# Altium PCB altium.PcbDoc (part 1 of 2)
Units mil, origin at the board's own origin, x right, y up, seen from the top; angles counter-clockwise.
Board outline 5119.1 x 2638.79 mil, 6 copper layers (TOP, L2_GND, L3_SIG, L4_VCC, L5_GND, BOTTOM), stack 61 mil thick; 336 components, 316 nets, 1351 pads, 0 vias.
Unrouted connection lines stored in the file: 850.
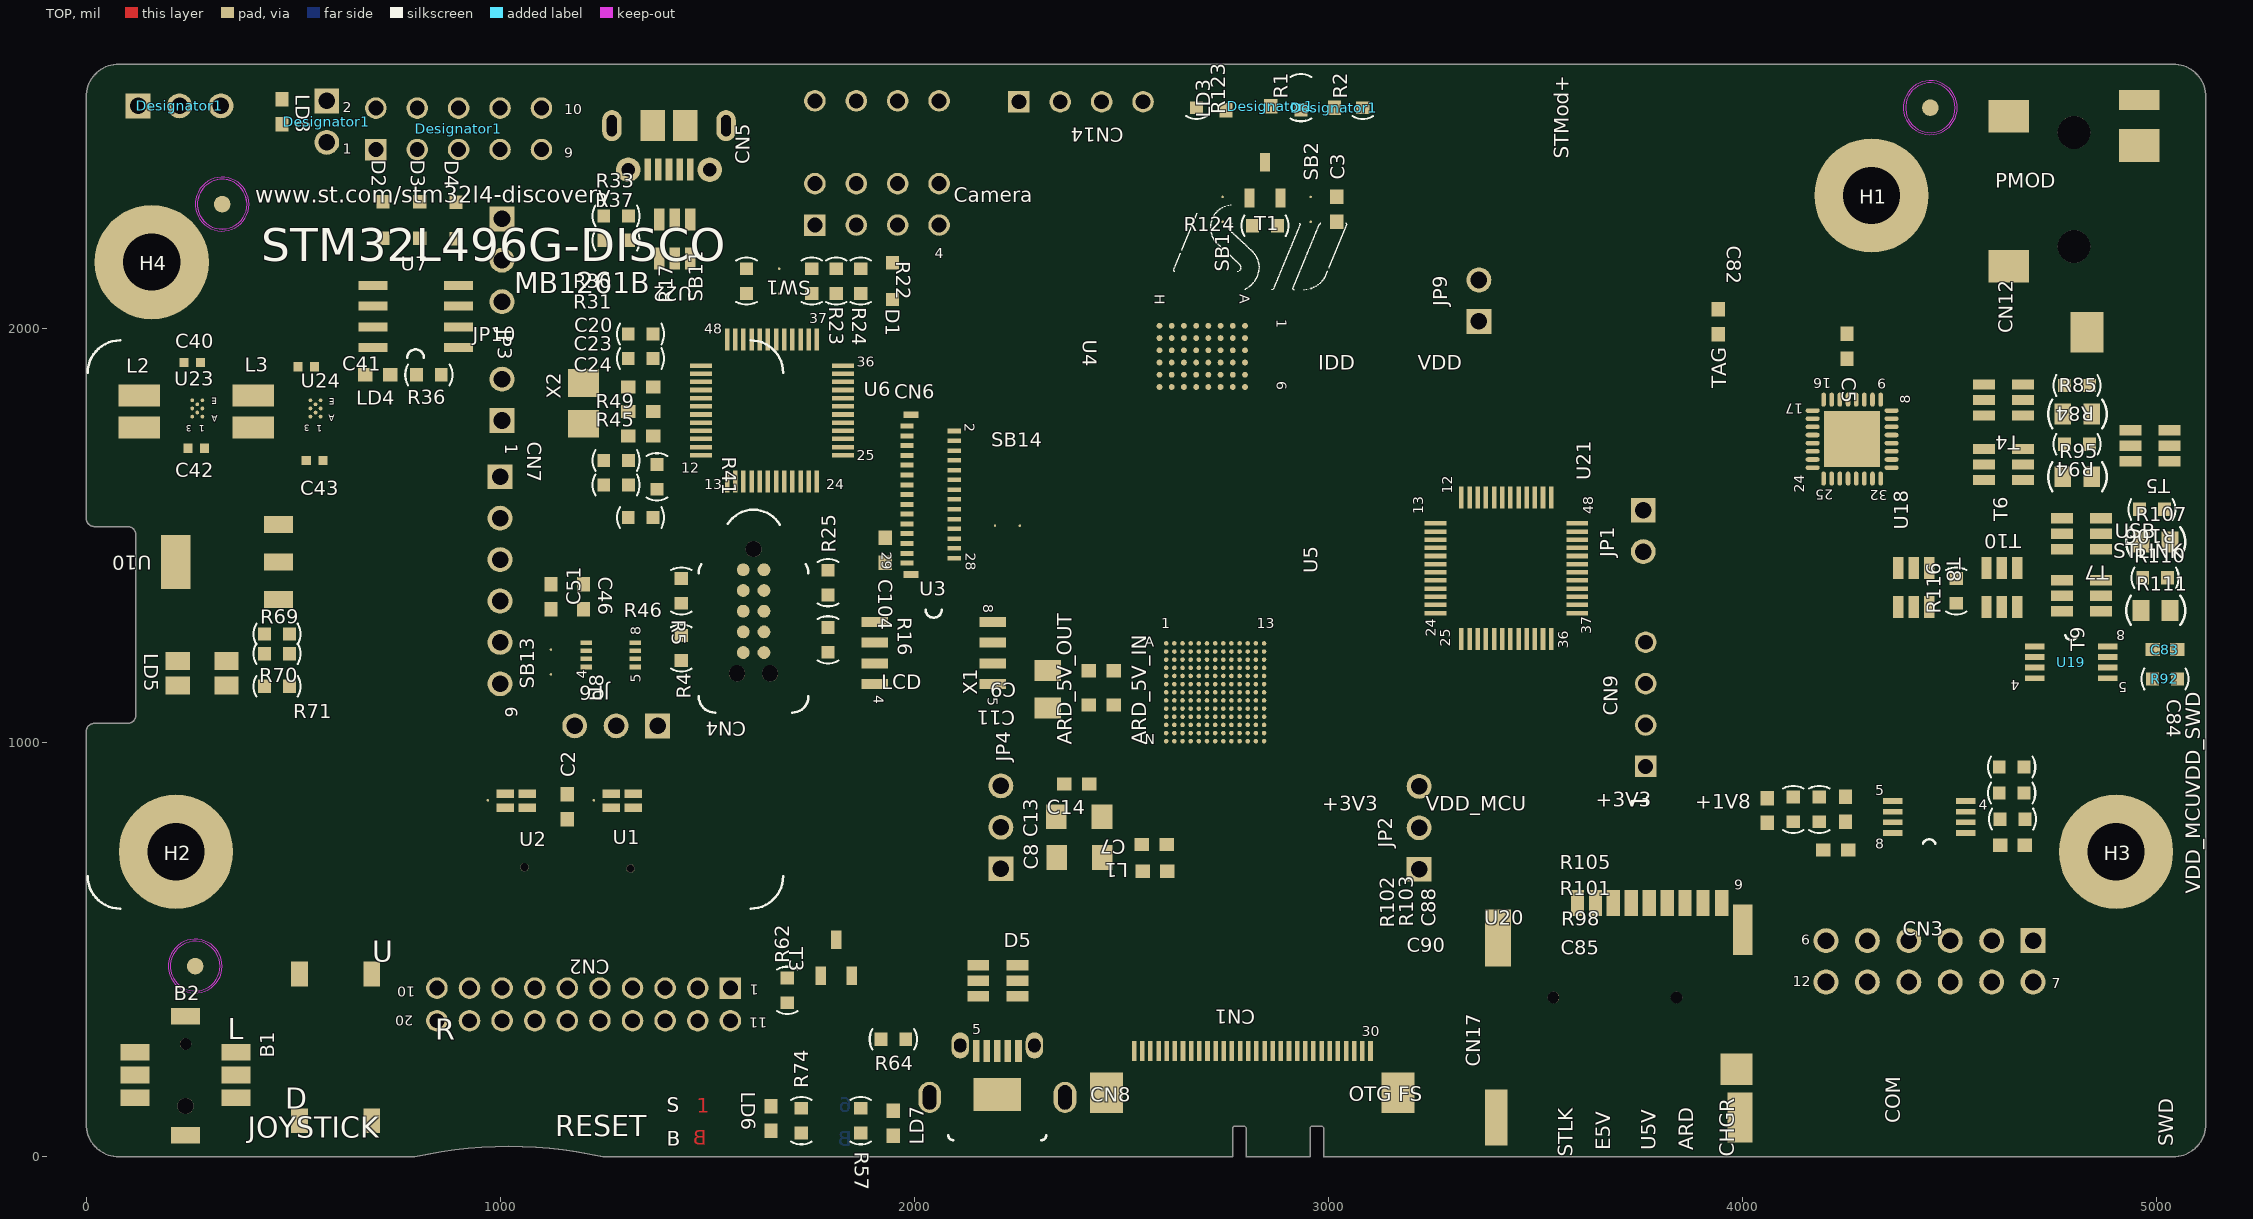
[diagram p0: TOP view]
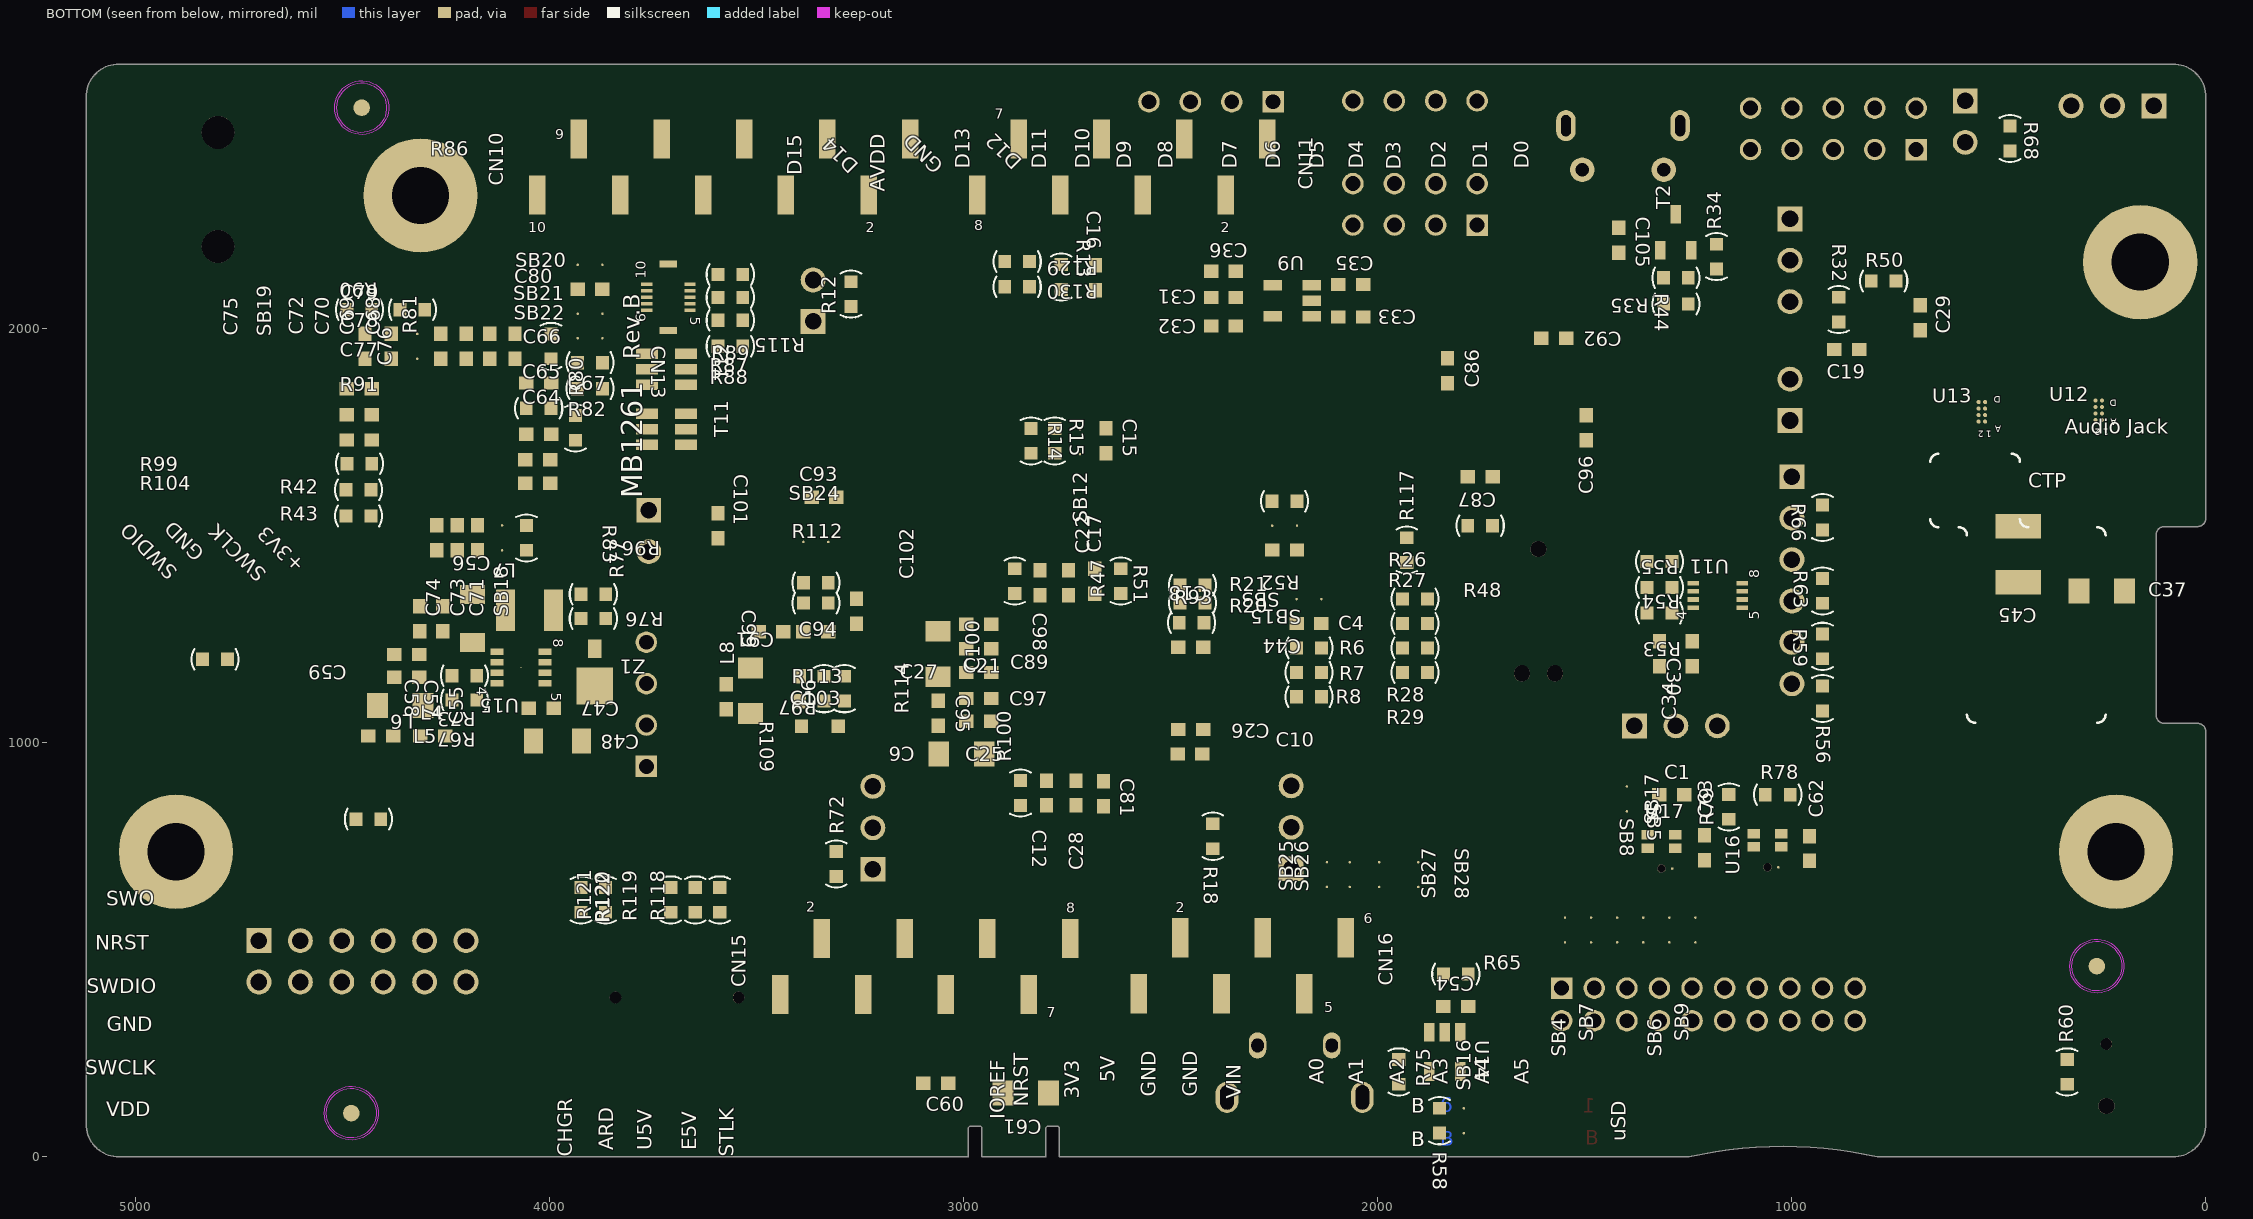
[diagram p1: BOTTOM view, seen from below]

## Layer stack, top to bottom
Top Solder: solder mask 0.6, Solder Resist, Dk 3.5
TOP: signal copper 0.8
Dielectric 1: core 2.8, FR-4, Dk 4.3
L2_GND: signal copper 0.8
Dielectric2: core 4, FR-4, Dk 4.3
L3_SIG: signal copper 0.6
Dielectric3: core 43, FR-4, Dk 4.3
L4_VCC: signal copper 0.6
Dielectric4: core 4, FR-4, Dk 4.3
L5_GND: signal copper 0.8
Dielectric5: core 2.8, FR-4, Dk 4.3
BOTTOM: signal copper 0.8
Bottom Solder: solder mask 0.6, Solder Resist, Dk 3.5

## Board outline
-0.5,78.74 ccw(c78.74,78.74) 78.74,-0.5 793.1,-0.5 793.27,-0.47 cw(c1020.6,-1007.5) 1247.93,-0.47 1248.1,-0.5 2767.86,-0.5 2768.36,0 2768.36,70.07 2772.01,73.72 2797.18,73.72 2800.83,70.07 2800.83,0 2801.33,-0.5 2954.87,-0.5 2955.37,0 2955.37,70.07 2959.02,73.72 2984.19,73.72 2987.84,70.07 2987.84,0 2988.34,-0.5 5039.36,-0.5 ccw(c5039.36,78.74) 5118.6,78.74 5118.6,2559.05 ccw(c5039.36,2559.05) 5039.36,2638.29 78.74,2638.29 ccw(c78.74,2559.05) -0.5,2559.05 -0.5,1541.93 ccw(c20,1541.93) 20,1521.43 100,1521.43 cw(c100,1501.93) 119.5,1501.93 119.5,1065.71 cw(c100,1065.71) 100,1046.21 20,1046.21 ccw(c20,1025.71) -0.5,1025.71

## Design rules (kind name [scope] priority, off if disabled: settings)
Clearance Clearance_Chevron [HasFootprint('SB_0603')] p1: gap=6 ignorepadtopadclearanceinfootprint=TRUE except(0: Arc-Text Arc-Hole Track-Text Track-Hole SMDPad-Text SMDPad-Hole THPad-Text THPad-Hole Via-Text Via-Hole Fill-Text Fill-Hole Poly-Text Poly-Hole Region-Text Region-Hole Text-Text Text-Hole; 3: Fill-Fill Fill-Poly Fill-Region Poly-Poly Poly-Region Region-Region; 5: Arc-SMDPad Arc-THPad Arc-Via Track-SMDPad Track-THPad Track-Via SMDPad-SMDPad SMDPad-THPad SMDPad-Via THPad-THPad THPad-Via Via-Via; 10: Arc-Arc Arc-Track Track-Track)
Clearance Clearance_3mm_BBvia [WithinRoom('RoomDefinition_3MM')      or (ObjectKind = 'Via') And (AsMils(HoleDiameter) = 4) vs (ObjectKind = 'Via') And (AsMils(HoleDiameter) = 4)] p2: gap=0 ignorepadtopadclearanceinfootprint=FALSE except(3: Arc-Via Track-Via; 4: SMDPad-Via THPad-Via Via-Via; 5: Via-Fill Via-Poly Via-Region)
Clearance Clearance_3mm_BBvia_via [WithinRoom('RoomDefinition_3MM')      or isvia vs (ObjectKind = 'Via') And (AsMils(HoleDiameter) = 4)] p3: gap=0 ignorepadtopadclearanceinfootprint=FALSE except(3: Arc-Via Track-Via; 4: SMDPad-Via THPad-Via Via-Via; 5: Via-Fill Via-Poly Via-Region)
Clearance Clearance_3mm [TouchesRoom('RoomDefinition_3MM')] p4: gap=5 ignorepadtopadclearanceinfootprint=FALSE except(0: Arc-Text Track-Text SMDPad-Text THPad-Text Via-Text Fill-Text Poly-Text Region-Text Text-Text Text-Hole; 3: Arc-SMDPad Arc-THPad Arc-Via Track-SMDPad Track-THPad Track-Via SMDPad-Via THPad-Via Via-Via; 4: Arc-Arc Arc-Track Arc-Hole Track-Track Track-Hole Via-Hole; 15: Fill-Fill Fill-Poly Fill-Region Poly-Poly Poly-Region Region-Region)
Clearance Clearance_BGA [TouchesRoom('RoomDefinition_BGA1')  or TouchesRoom('RoomDefinition_BGA2')        or TouchesRoom('RoomDefinition_BGA3')    or TouchesRoom('RoomDefinition_BGA4')    or WithinRoom('RoomDefinition_BGA5')    or WithinRoom('RoomDefinition_BGA6')] p5: gap=5 ignorepadtopadclearanceinfootprint=FALSE except(0: Arc-Text Arc-Hole Track-Text Track-Hole SMDPad-Text SMDPad-Hole THPad-Text THPad-Hole Via-Text Via-Hole Fill-Text Fill-Hole Poly-Text Poly-Hole Region-Text Region-Hole Text-Text Text-Hole; 4: Arc-Arc Arc-Track Arc-SMDPad Arc-THPad Arc-Via Track-Track Track-SMDPad Track-THPad Track-Via SMDPad-Via THPad-Via; 15: Fill-Fill Fill-Poly Fill-Region Poly-Poly Poly-Region Region-Region)
Clearance Clearance_Default_L3_L4 [OnLayer('L3_SIG') or              OnLayer('L4_VCC')] p6: gap=6 ignorepadtopadclearanceinfootprint=FALSE except(0: Arc-Text Arc-Hole Track-Text Track-Hole SMDPad-Text SMDPad-Hole THPad-Text THPad-Hole Via-Text Via-Hole Fill-Text Fill-Hole Poly-Text Poly-Hole Region-Text Region-Hole Text-Text Text-Hole; 5: Arc-SMDPad Arc-THPad Arc-Via Track-SMDPad Track-THPad Track-Via SMDPad-SMDPad SMDPad-THPad SMDPad-Via THPad-THPad THPad-Via Via-Via; 8: Arc-Arc Arc-Track Track-Track; 20: Fill-Fill Fill-Poly Fill-Region Poly-Poly Poly-Region Region-Region)
Clearance Clearance_Default [All] p7: gap=6 ignorepadtopadclearanceinfootprint=FALSE except(0: Arc-Text Track-Text SMDPad-Text THPad-Text Via-Text Fill-Text Poly-Text Region-Text Text-Text Text-Hole; 5: Arc-SMDPad Arc-THPad Arc-Via Arc-Hole Track-SMDPad Track-THPad Track-Via Track-Hole SMDPad-SMDPad SMDPad-THPad SMDPad-Via SMDPad-Hole THPad-THPad THPad-Via THPad-Hole Via-Via Via-Hole; 10: Arc-Arc Arc-Track Track-Track; 20: Fill-Fill Fill-Poly Fill-Region Poly-Poly Poly-Region Region-Region)
ComponentClearance [All] p1: gap=0 collisioncheckmode=3 verticalgap=0 showdistances=FALSE
DiffPairsRouting [InDifferentialPairClass('90Ohms')] p1: maxlimit=10.2 minlimit=9.5 mostfreqgap=10.2 toplayer_mingap=10.2 toplayer_minwidth=4.8 toplayer_maxwidth=4.8 toplayer_prefwidth=4.8 midlayer1_mingap=10.2 midlayer1_minwidth=4.8 midlayer1_maxwidth=4.8 midlayer1_prefwidth=4.8 midlayer2_maxgap=9.5 midlayer2_prefgap=9.5 midlayer2_minwidth=5.5 midlayer2_maxwidth=5.5 midlayer2_prefwidth=5.5 midlayer3_maxgap=9.5 midlayer3_prefgap=9.5 midlayer3_minwidth=5.5 midlayer3_maxwidth=5.5 midlayer3_prefwidth=5.5 midlayer4_mingap=10.2 midlayer4_minwidth=4.8 midlayer4_maxwidth=4.8 midlayer4_prefwidth=4.8 bottomlayer_mingap=10.2 bottomlayer_minwidth=4.8 bottomlayer_maxwidth=4.8 bottomlayer_prefwidth=4.8 maxuncoupledlength=500
HoleSize [All] p1: absolutevalues=TRUE maxlimit=140 minlimit=1 maxpercent=80.000 minpercent=20.000
HoleToHoleClearance [All] p1: gap=5 allowstackedmicrovias=TRUE
PlaneConnect PlaneConnect_BGA8 [(ObjectKind = 'Component') And (Footprint = 'BGA8_0R312-0R25_1R11X1R41')] p1: planeconnectstyle=Direct reliefexpansion=20 reliefentries=4 reliefconductorwidth=10 reliefairgap=10
PlaneConnect [All] p2: planeconnectstyle=Relief reliefexpansion=20 reliefentries=4 reliefconductorwidth=10 reliefairgap=10
PolygonConnect PolygonConnect_Hole [(Component = 'H4') or (Component = 'H3') or (Component = 'H2')or (Component = 'H1')] p1: connectstyle=Direct reliefconductorwidth=10 reliefentries=4 polygonreliefangle="90 Angle" airgapwidth=10
PolygonConnect PolygonConnect_USB [(ObjectKind = 'Pad') And (Layer = 'TOP') And (Name = 'CN5-10') or  (ObjectKind = 'Pad') And (Layer = 'TOP') And (Name = 'CN5-11') or (ObjectKind = 'Pad') And (Layer = 'TOP') And (Name = 'CN8-10')] p2: connectstyle=Direct reliefconductorwidth=10 reliefentries=4 polygonreliefangle="90 Angle" airgapwidth=10
PolygonConnect PolygonConnect_U17-U16 [(ObjectKind = 'Pad') And (Name = 'U17-3') or (ObjectKind = 'Pad') And (Name = 'U16-3')] p3: connectstyle=Direct reliefconductorwidth=10 reliefentries=4 polygonreliefangle="90 Angle" airgapwidth=10
PolygonConnect PolygonConnect_via [IsVia] p4: connectstyle=Direct reliefconductorwidth=10 reliefentries=4 polygonreliefangle="90 Angle" airgapwidth=10
PolygonConnect PolygonConnect_bga8 [(ObjectKind = 'Pad') And (Component = 'U23')or (Component = 'U24')or (Component = 'U12')or (Component = 'U13')] p5: connectstyle=Direct reliefconductorwidth=10 reliefentries=4 polygonreliefangle="90 Angle" airgapwidth=10
PolygonConnect [All] p6: connectstyle=Relief reliefconductorwidth=10 reliefentries=4 polygonreliefangle="90 Angle" airgapwidth=6
RoomDefinition Power [InComponentClass('Power')] p1: confinementstyle=ConfineIn formatcopy=TRUE lockcomponents=FALSE outline 4918.63,1185 4967.03,1185 4967.03,1241.2 4918.63,1241.2
RoomDefinition PSRAM [InComponentClass('PSRAM')] p2: confinementstyle=ConfineIn formatcopy=TRUE lockcomponents=FALSE outline 4384,1384 4444,1384 4444,1474 4384,1474
RoomDefinition QSPI [InComponentClass('QSPI')] p3: confinementstyle=ConfineIn formatcopy=TRUE lockcomponents=FALSE outline 3780,565 3780,610 3790,620 3805,620 3820,605 3878,605 3878,535.3 3809.7,535.3
RoutingVias [All] p1: holewidth=12 width=24 viastyle="Through Hole" minholewidth=4 minwidth=10 maxholewidth=12 maxwidth=24
ShortCircuit [(ObjectKind = 'Pad') And (Component = 'SW1')] p1: allowed=TRUE
SolderMaskExpansion [All] p1: expansion=3 istentingtop=FALSE
Width Width_20 [InNetClass('20MIL')] p1: maxlimit=100 minlimit=5 preferedwidth=20 minimp=50.000000 maximp=50.000000 favimp=50.000000
Width Width_3mm [TouchesRoom('RoomDefinition_3MM')] p2: maxlimit=100 minlimit=3.5 preferedwidth=3.5 minimp=50.000000 maximp=50.000000 favimp=50.000000
Width Width_BGA [WithinRoom('RoomDefinition_BGA1') or   WithinRoom('RoomDefinition_BGA2') or             WithinRoom('RoomDefinition_BGA3') or     WithinRoom('RoomDefinition_BGA4') or      WithinRoom('RoomDefinition_BGA5') or          WithinRoom('RoomDefinition_BGA6') or   WithinRoom('RoomDefinition_BGA7')] p3: maxlimit=12 minlimit=4 preferedwidth=4 midlayer1_maxwidth=10 midlayer2_maxwidth=10 midlayer3_maxwidth=10 midlayer4_maxwidth=10 bottomlayer_maxwidth=10 minimp=50.000000 maximp=50.000000 favimp=50.000000
Width [All] p4: maxlimit=100 minlimit=4 preferedwidth=4 toplayer_minwidth=5 toplayer_prefwidth=5 bottomlayer_minwidth=5 bottomlayer_prefwidth=5 minimp=60.000000 maximp=60.000000 favimp=60.000000
24 further rules are at their usual default settings.

## Classes and differential pairs
component class U_Top: H1 H2 H3 H4
component class TFT_LCD: C44 C47 C48 C55 C56 C57 C58 C59 C80 C82 C104 CN6 CN13 L4 L5 L6 L7 R52 R67 R73 R76 R77 R87 R88 R89 R99 R104 R115 R117 SB14 SB15 SB20 SB21 SB22 T11 T12 U15 Z1 ZZ1
component class STMOD+: CN2 CN3 SB4 SB5 SB6 SB7 SB8 SB9
component class ST_LINK: C19 C20 C23 C24 C29 C30 C31 C32 C33 C34 C35 C36 C46 C51 C86 C87 C92 C96 C105 CN4 CN5 CN7 CN14 D1 D2 D3 D4 JP6 JP10 LD4 LD5 R4 R5 R16 R17 R22 R23 R24 R25 R30 R31 R32 R33 R34 R35 R36 R37 R41 R44 R45 R46 R47 R48 R49 R50 R51 R53 R54 R55 R56 R59 R63 R66 R69 R70 R71 SB11 SB13 SW1 T2 U6 U7 U8 U9 U11 U22 X2
component class QSPI: C4 R6 R7 R8 R26 R27 R28 R29 SB3 U3
component class PSRAM: C15 C16 JP9 R12 R13 R14 R15 R129 R130 SB12 U4
component class Power: C37 C40 C41 C42 C43 C45 JP3 JP5 JP7 JP8 L2 L3 LD8 R68 U10 U12 U13 U23 U24
component class Peripherals: B1 B2 CN17 LD1 LD2 R1 R2 R60 R118 R119 R120 R121 R122
component class OTG: C54 CN8 D5 LD6 LD7 R57 R58 R62 R64 R65 R74 R75 SB16 T3 U14
component class MCU: C6 C7 C8 C9 C10 C11 C12 C13 C14 C17 C18 C21 C22 C25 C26 C27 C28 C81 C89 C95 C97 C98 C100 JP4 L1 R18 R20 R21 R42 R43 R93 U5 X1
component class IDD: C83 C84 C85 C88 C90 C91 C93 C94 C99 C101 C102 C103 CN9 D6 JP1 JP2 L8 R84 R85 R92 R94 R95 R96 R97 R98 R101 R102 R103 R105 R106 R107 R109 R110 R111 R112 R113 R114 R116 SB24 T4 T5 T6 T7 T8 T9 T10 U19 U20 U21
component class "Camera Interface": C60 C61 CN1 R100
component class Audio: C1 C2 C5 C62 C63 C64 C65 C66 C67 C68 C69 C70 C71 C72 C73 C74 C75 C76 C77 C78 C79 CN12 R78 R79 R80 R81 R82 R83 R86 R90 R91 SB17 SB18 SB19 U1 U2 U16 U17 U18
component class "Arduino_ Connectors": C3 CN10 CN11 CN15 CN16 LD3 R72 R123 R124 SB1 SB2 SB25 SB26 SB27 SB28 T1
net class PSRAM_A[0..18]: PSRAM_A0 PSRAM_A1 PSRAM_A2 PSRAM_A3 PSRAM_A4 PSRAM_A5 PSRAM_A6 PSRAM_A7 PSRAM_A8 PSRAM_A9 PSRAM_A10 PSRAM_A11 PSRAM_A12 PSRAM_A13 PSRAM_A14 PSRAM_A15 PSRAM_A16 PSRAM_A17 PSRAM_A18
net class D[0..15]: D0 D1 D2 D3 D4 D5 D6 D7 D8 D9 D10 D11 D12 D13 D14 D15
net class DCMI_D[0..7]: DCMI_D0 DCMI_D1 DCMI_D2 DCMI_D3 DCMI_D4 DCMI_D5 DCMI_D6 DCMI_D7
differential pair D_: +D_P -D_N

## Components (designator, comment, footprint, x,y, rotation, side; value= is the part's Value field where it differs from the comment)
B1 "TD-0341X-A00" PB10 602.36,263.78 r270 top
B2 "MT008-A" MT-008A 240.94,193.31 r270 top
C1 "CC0603KRX7R7BB104" 0603C 1289.37,873.62 r180 bottom value=100nF
C2 "CC0603KRX7R7BB104" 0603C 1161.42,844.49 r270 top value=100nF
C3 "[N/A]" 0603C 3019.68,2287.4 r90 top value=100nF
C4 "CC0603KRX7R7BB104" 0603C 2165.35,1287.4 r180 bottom value=100nF
C5 "CC0603KRX7R7BB104" 0603C 4251.97,1956.69 r90 top value=100nF
C6 "TAJA475K016R" TAN-A 3004.72,972.44 r180 bottom value=4.7uF
C7 "CC0603KRX7R7BB104" 0603C 2578.74,753.94 r0 top value=100nF
C8 "TAJA105K016R" TAN-A 2398.43,722.44 r0 top value=1uF
C9 "5.6pF" 0603C 2450.79,1173.23 r0 top
C10 "CC0603KRX7R7BB104" 0603C 2452.76,972.44 r180 bottom value=100nF
C11 "5.6pF" 0603C 2450.79,1090.55 r0 top
C12 "CC0603KRX7R7BB104" 0603C 2799.21,877.95 r270 bottom value=100nF
C13 "TAJA105K016R" TAN-A 2397.64,820.87 r0 top value=1uF
C14 "CC0603KRX7R7BB104" 0603C 2391.73,899.61 r180 top value=100nF
C15 "CC0603KRX7R7BB104" 0603C 2655.51,1728.35 r270 bottom value=100nF
C16 "CC0603KRX7R7BB104" 0603C 2681.1,2122.05 r90 bottom value=100nF
C17 "CC0603KRX7R7BB104" 0603C 2683.07,1389.76 r90 bottom value=100nF
C18 "CC0603KRX7R7BB104" 0603C 2450.79,1230.32 r180 bottom value=100nF
C19 "CC0603KRX5R7BB105" 0603C 866.54,1948.82 r0 bottom value=1uF
C20 "CC0603JRNPO9BN100" 0603C 1338.58,1858.27 r0 top value=10pF
C21 "CC0603KRX7R7BB104" 0603C 2962.6,1285.43 r0 bottom value=100nF
C22 "CC0603KRX7R7BB104" 0603C 2746.06,1385.83 r90 bottom value=100nF
C23 "CC0603JRNPO9BN100" 0603C 1338.58,1799.21 r0 top value=10pF
C24 "CC0603KRX7R7BB104" 0603C 1338.58,1740.16 r180 top value=100nF
C25 "CC0603KRX7R7BB104" 0603C 2962.6,1051.18 r0 bottom value=100nF
C26 "CC0603KRX7R7BB104" 0603C 2450.79,1031.5 r180 bottom value=100nF
C27 "CC0603KRX7R7BB104" 0603C 2962.6,1169.29 r0 bottom value=100nF
C28 "CC0603KRX7R7BB104" 0603C 2728.35,877.95 r270 bottom value=100nF
C29 "CC0603KRX7R7BB104" 0603C 689.37,2025.59 r270 bottom value=100nF
C30 "CC0603KRX7R7BB104" 0603C 1240.16,1214.17 r90 bottom value=100nF
C31 "CC0603KRX7R7BB104" 0603C 2372.05,2074.8 r0 bottom value=100nF
C32 "CC0603KRX5R7BB105" 0603C 2372.05,2005.91 r0 bottom value=1uF
C33 "CC0603KRX7R7BB104" 0603C 2064.96,2027.56 r180 bottom value=100nF
C34 "CC0603KRX7R7BB104" 0603C 1318.9,1214.17 r270 bottom value=100nF
C35 "CC0603KRX5R7BB105" 0603C 2064.96,2106.3 r180 bottom value=1uF
C36 "CC0603KRX7R9BB103" 0603C 2372.05,2137.8 r0 bottom value=10nF
C37 "TAJA106K016R" TAN-A 251.18,1366.14 r180 bottom value=10uF
C40 "GRM155R60J106ME11" 0402C 255.91,1917.32 r0 top value=10uF
C41 "GRM155R60J106ME11" 0402C 531.5,1907.48 r0 top value=10uF
C42 "GRM155R60J106ME11" 0402C 265.75,1710.63 r0 top value=10uF
C43 "GRM155R60J106ME11" 0402C 551.18,1681.1 r0 top value=10uF
C44 "CC0603KRX7R7BB104" 0603C 2224.41,1464.57 r0 bottom value=100nF
C45 "TAJB106K025RNJ" TAN-B 452.76,1454.72 r270 bottom value=10uF
C46 "CC0603KRX7R7BB104" 0603C 1200.79,1351.97 r270 top value=100nF
C47 "CC0603KRX7R9BB103" 0603C 4019.68,1082.68 r0 bottom value=10nF
C48 "CC1206KKX7R9BB475" 1206C 3980.32,1003.94 r0 bottom value=4.7uF
C51 "CC0603KRX7R7BB104" 0603C 1122.05,1351.97 r90 top value=100nF
C54 "CC0603KRX5R7BB475" 0603C 1811.02,362.2 r0 bottom value=4.7uF
C55 "TAJA106K016R" TAN-A 4359.84,1089.76 r0 bottom value=10uF
C56 "GRM31CR71A475KA01L" 1206C 4185.43,1299.21 r90 bottom value=4.7uF
C57 "CC0603KRX7R9BB103" 0603C 4257.48,1299.21 r90 bottom value=10nF
C58 "CC0603KRX7R7BB104" 0603C 4312.6,1299.21 r90 bottom value=100nF
C59 "CC0603KRX7R7BB104" 0603C 4344.09,1157.48 r180 bottom value=100nF
C60 "CC0603KRX7R7BB104" 0603C 3066.93,177.17 r180 bottom value=100nF
C61 "TAJA106K016R" TAN-A 2849.61,153.54 r0 bottom value=10uF
C62 "[N/A]" 0603C 956.69,744.09 r270 bottom value=100nF
C63 "[N/A]" 0603C 1210.63,745.67 r270 bottom value=100nF
C64 "CC0603JRNPO9BN151" 0603C 4027.56,1625.98 r180 bottom value=150pF
C65 "CC0603JRNPO9BN151" 0603C 4027.56,1683.07 r180 bottom value=150pF
C66 "CC0603KRX7R7BB104" 0603C 4025.59,1744.09 r0 bottom value=100nF
C67 "CC0603KRX5R7BB105" 0603C 4025.59,1868.11 r0 bottom value=1uF
C68 "C1608X5R1A106KT000E" 0603C 4082.68,1956.69 r270 bottom value=10uF
C69 "CC0603KRX5R7BB105" 0603C 4143.7,1956.69 r270 bottom value=1uF
C70 "CC0603KRX5R7BB105" 0603C 4200.79,1956.69 r270 bottom value=1uF
C71 "CC0603KRX7R7BB104" 0603C 4173.23,1494.09 r90 bottom value=100nF
C72 "CC0603KRX7R7BB104" 0603C 4262.2,1956.69 r90 bottom value=100nF
C73 "CC0603KRX7R7BB104" 0603C 4222.44,1494.09 r270 bottom value=100nF
C74 "CC0603KRX5R7BB105" 0603C 4271.65,1494.09 r270 bottom value=1uF
C75 "CC0603KRX7R8BB223" 0603C 4381.89,1956.69 r90 bottom value=22nF
C76 "CC0603KRX7R8BB223" 0603C 4444.88,1956.69 r90 bottom value=22nF
C77 "CC0603KRX5R7BB105" 0603C 4458.66,1730.32 r0 bottom value=1uF
C78 "CC0603KRX5R7BB105" 0603C 4458.66,1791.34 r180 bottom value=1uF
C79 "CC0603KRX5R7BB105" 0603C 4458.66,1854.33 r180 bottom value=1uF
C80 "CC0603KRX7R7BB104" 0603C 3901.57,2094.49 r0 bottom value=100nF
C81 "CC0603KRX7R7BB104" 0603C 2661.42,875.98 r270 bottom value=100nF
C82 "CC0603KRX7R7BB104" 0603C 3940.94,2015.75 r270 top value=100nF
C83 "CC0603KRX7R7BB104" 0603C 5019.68,1224.41 r180 top value=100nF
C84 "CC0603KRX5R7BB105" 0603C 4059.06,835.83 r270 top value=1uF
C85 "CC0603KRX7R7BB104" 0603C 4651.57,751.97 r180 top value=100nF
C86 "CC0603KRX7R7BB104" 0603C 1830.71,1897.64 r270 bottom value=100nF
C87 "CC0603KRX7R7BB104" 0603C 1751.97,1641.73 r180 bottom value=100nF
C88 "CC0603KRX7R7BB104" 0603C 4248.03,838.58 r270 top value=100nF
C89 "CC0603KRX7R7BB104" 0603C 2962.6,1226.38 r0 bottom value=100nF
C90 "CC0603KRX7R7BB104" 0603C 4224.41,740.16 r180 top value=100nF
C91 "TAJA105K016R" TAN-A 3513.78,1124.8 r90 bottom value=1uF
C92 "CC0603KRX7R7BB104" 0603C 1574.8,1976.38 r0 bottom value=100nF
C93 "CC0603KRX7R7BB104" 0603C 3336.61,1592.52 r0 bottom value=100nF
C94 "CC0603KRX7R7BB104" 0603C 3464.57,1267.72 r180 bottom value=100nF
C95 "CC0603KRX7R7BB104" 0603C 3061.02,1070.87 r90 bottom value=100nF
C96 "CC0603KRX7R7BB104" 0603C 1496.06,1759.84 r90 bottom value=100nF
C97 "CC0603KRX7R7BB104" 0603C 2962.6,1106.3 r0 bottom value=100nF
C98 "CC0603KRX7R7BB104" 0603C 2814.96,1385.83 r90 bottom value=100nF
C99 "[N/A]" 0603C 3395.67,1129.92 r90 bottom value=100nF
C100 "TAJA105K016R" TAN-A 3061.02,1213.78 r270 bottom value=1uF
C101 "CC0603KRX7R7BB104" 0603C 3592.52,1523.62 r270 bottom value=100nF
C102 "CC0603KRX7R7BB104" 0603C 3257.87,1316.93 r90 bottom value=100nF
C103 "CC0603KRX7R7BB104" 0603C 3356.3,1267.72 r0 bottom value=100nF
C104 "CC0603KRX7R7BB104" 0603C 1929.13,1464.57 r270 top value=100nF
C105 "CC0603KRX7R7BB104" 0603C 1417.32,2212.6 r90 bottom value=100nF
CN1 "FPU330ZH-BT1D3-CA" FPU330ZH-BT1D3-CA 2815.35,162.6 r0 top
CN2 "SQT-110-01-F-D-RA" SQT-110-01-F-D-RA 1196.06,231.89 r0 top
CN3 "SSW-106-02-F-D-RA" SSW-106-02-F-D-RA 4451.18,292.13 r0 top
CN4 "Tag-10_C" TC2050-IDC-NL 1611.42,1316.93 r270 top
CN5 "1050170001" MICRO_USB_B_105017 1407.09,2469.68 r180 top
CN6 "FH26-29S-0.3SHW" FH26-29S-0R3SHW 2041.34,1600 r270 top
CN7 "313106S111116" HDR_1X6_2R54_W 999.21,1391.73 r270 top
CN8 "475900001" MOLEX_47590001 2200,170.47 r0 top
CN9 "[N/A]" HDR_1X4_2R54 3765.75,1092.13 r270 top
CN10 "SSW-110-22-X-S-VS" SSW-110-22-X-S-VS 3578.74,2389.76 r180 bottom
CN11 "SSW-108-22-X-S-VS" SSW-108-22-X-S-VS 2616.54,2389.76 r180 bottom
CN12 "PJ3028B-3" PJ3028B 4800,2325 r90 top
CN13 "DF37NB-10DS-0.4V (5x)" DF37NB-10DS-0R4V 3712.6,2074.8 r270 bottom
CN14 "[N/A]" HDR_1X4_2R54 2401.97,2547.24 r180 top
CN15 "SSW-108-22-X-S-VS" SSW-108-22-X-S-VS 3092.13,459.06 r0 bottom
CN16 "SSW-106-22-X-S-VS" SSW-106-22-X-S-VS 2326.77,460.63 r0 bottom
CN17 "PJS008-2000" MSD_PJS008_ 3700.39,334.25 r180 top
D1 "BAT60JFILM" SOD-323 1948.03,2114.17 r90 top
D2 "[N/A]" SOD-323 717.72,2261.81 r90 top
D3 "BAT60JFILM" SOD-323 806.3,2261.81 r90 top
D4 "[N/A]" SOD-323 893.7,2260.63 r90 top
D5 "ESDA6V1BC6" SOT23-6L 2201.18,424.8 r270 top
D6 "BAT60JFILM" SOD-323 3346.46,1040.16 r0 bottom
Designator1 "2 PIN Jumper" SIP2 580.71,2499.21 r270 top (schematic designator JP8)
Designator1 "3 PIN Jumper" SIP3 225.2,2537.4 r0 top (schematic designator JP5)
Designator1 "Header M Straight 5x2H" HDR_2X5_2R54 899.61,2481.89 r0 top (schematic designator JP7)
Designator1 "19-217/S2C-AM2N2VY/3T" 0603D#1 2860.24,2566.93 r90 top (schematic designator LD1)
Designator1 "19-213SY6C/S530-E2/TR8LED" 0603D#1 3014.17,2562.99 r90 top (schematic designator LD2)
H1 "POSITION HOLE" HOLE_C7D3R5 4311.02,2320.87 r0 top
H2 "POSITION HOLE" HOLE_C7D3R5 216.54,736.22 r0 top
H3 "POSITION HOLE" HOLE_C7D3R5 4901.57,736.22 r0 top
H4 "POSITION HOLE" HOLE_C7D3R5 158,2160 r0 top
JP1 "[N/A]" SIP2 3759.84,1511.02 r270 top
JP2 "3 PIN Jumper" SIP3 3218.5,794.09 r90 top
JP3 "3 PIN Jumper" SIP3 1003.94,2164.57 r270 top
JP4 "Jumper3" SIP3 2208.66,795.28 r90 top
JP6 "3 PIN Jumper" SIP3 1279.53,1040.16 r180 top
JP9 "2 PIN Jumper" SIP2 3362.99,2066.93 r90 top
JP10 "[N/A]" SIP2 1003.94,1827.56 r90 top
L1 "FCM1608KF-601T03" 0603L 2580.71,688.98 r180 top value=100uH
L2 "2.2uH" L1008_L0805_CPT 127.95,1799.21 r90 top
L3 "2.2uH" L1008_L0805_CPT 403.54,1799.21 r90 top
L4 "FCM1608KF-601T03" 0603L 4281.1,1015.75 r0 bottom value=100uH
L5 "FCM1608KF-601T03" 0603L 4407.09,1015.75 r0 bottom value=100uH
L6 "FCM1608KF-601T03" 0603L 4344.09,1212.6 r180 bottom value=100uH
L7 "LQH32PN4R7NN0L" 1210L 4047.64,1318.9 r180 bottom value=100uH
L8 "FCM1608KF-601T03" 0603L 3572.83,1110.24 r90 bottom value=100uH
LD3 "19-213SY6C/S530-E2/TR8LED" 0603D#2 2751.97,2557.09 r270 top
LD4 "19-217/R6C-AL1M2VY/3T" 0603D#3 703.54,1887.8 r180 top
LD5 "HSMF-A201-A00J1" LED2_3528 279.53,1167.32 r90 top
LD6 "19-213SY6C/S530-E2/TR8LED" 0603D#3 1653.54,92.13 r90 top
LD7 "19-217/R6C-AL1M2VY/3T" 0603D#3 1948.82,80.71 r270 top
LD8 "19-213SY6C/S530-E2/TR8LED" 0603D#3 472.44,2523.23 r90 top
R1 "RC0603FR-07680RL" 0603R#1 2933.07,2557.09 r90 top value=680
R2 "RC0603FR-07510RL" 0603R#1 3082.68,2562.99 r90 top value=510
R4 "RC0603JR-07100RL" 0603R#2 1437.01,1228.35 r270 top value=100
R5 "RC0603JR-07100RL" 0603R#2 1437.01,1366.14 r270 top value=100
R6 "RC0603JR-0722RL" 0603R#2 2165.35,1228.35 r0 bottom value=22
R7 "RC0603JR-0722RL" 0603R#2 2165.35,1169.29 r0 bottom value=22
R8 "RC0603JR-0722RL" 0603R#2 2165.35,1110.24 r0 bottom value=22
R12 "0" 0603R#2 3271.65,2082.68 r270 bottom
R13 "RC0603FR-07100KL" 0603R#2 2763.78,2124.02 r90 bottom value=100K
R14 "RC0603FR-07100KL" 0603R#2 2836.61,1728.35 r270 bottom value=100K
R15 "RC0603FR-07100KL" 0603R#2 2779.53,1728.35 r90 bottom value=100K
R16 "RC0603JR-07100RL" 0603R#2 1791.34,1248.03 r90 top value=100
R17 "RC0603FR-07100KL" 0603R#2 1594.49,2114.17 r90 top value=100K
R18 "[N/A]" 0603R#2 2397.64,773.62 r270 bottom value=0
R20 "RC0603FR-07100KL" 0603R#2 2446.85,1336.61 r0 bottom value=100K
R21 "[N/A]" 0603R#2 2446.85,1379.92 r0 bottom value=100K
R22 "RC0603FR-074K7L" 0603R#2 1751.97,2114.17 r90 top value=4K7
R23 "RC0603FR-072K7L" 0603R#2 1811.02,2114.17 r270 top value=2K7
R24 "[N/A]" 0603R#2 1870.08,2114.17 r90 top value=0Ohm
R25 "RC0603JR-07100RL" 0603R#2 1791.34,1385.83 r270 top value=100
R26 "RC0603JR-0722RL" 0603R#2 1909.45,1346.46 r180 bottom value=22
R27 "RC0603FR-0710KL" 0603R#2 1909.45,1287.4 r0 bottom value=10K
R28 "RC0603JR-0722RL" 0603R#2 1909.45,1228.35 r180 bottom value=22
R29 "RC0603JR-0722RL" 0603R#2 1909.45,1169.29 r180 bottom value=22
R30 "RC0603FR-0710KL" 0603R#2 1338.58,1986.22 r0 top value=10K
R31 "[N/A]" 0603R#2 1338.58,1927.17 r0 top value=100K
R32 "RC0603FR-0710KL" 0603R#2 886.22,2045.28 r90 bottom value=10K
R33 "RC0603FR-07100KL" 0603R#2 1279.53,2271.65 r0 top value=100K
R34 "RC0603FR-0736KL" 0603R#2 1181.1,2173.23 r90 bottom value=36K
R35 "RC0603JR-07100RL" 0603R#2 1279.53,2059.06 r0 bottom value=100
R36 "820" 0603R#2 827.17,1887.8 r0 top
R37 "RC0603FR-071K5L" 0603R#2 1279.53,2212.6 r0 top value=1K5
R41 "[N/A]" 0603R#2 1377.95,1641.73 r270 top value=100K
R42 "RC0603FR-071K5L" 0603R#2 4460.63,1610.24 r180 bottom value=1K5
R43 "RC0603FR-071K5L" 0603R#2 4460.63,1547.24 r180 bottom value=1K5
R44 "RC0603FR-0710KL" 0603R#2 1279.53,2122.05 r180 bottom value=10K
R45 "RC0603FR-074K7L" 0603R#2 1279.53,1622.05 r180 top value=4K7
R46 "RC0603JR-070RL" 0603R#2 1338.58,1543.31 r180 top value=0
R47 "RC0603JR-070RL" 0603R#2 2875.98,1389.76 r90 bottom value=0
R48 "RC0603FR-07100KL" 0603R#2 1751.97,1523.62 r180 bottom value=100K
R49 "RC0603FR-074K7L" 0603R#2 1279.53,1681.1 r180 top value=4K7
R50 "RC0603FR-072K2L" 0603R#2 777.56,2114.17 r180 bottom value=2K2
R51 "RC0603JR-070RL" 0603R#2 2620.08,1389.76 r90 bottom value=0
R52 "RC0603FR-07100KL" 0603R#2 2224.41,1582.68 r0 bottom value=100K
R53 "RC0603FR-07100KL" 0603R#2 1318.9,1312.6 r0 bottom value=100K
R54 "RC0603FR-07100KL" 0603R#2 1318.9,1437.01 r0 bottom value=100K
R55 "RC0603JR-070RL" 0603R#2 1318.9,1374.02 r180 bottom value=0
R56 "RC0603JR-07100RL" 0603R#2 925.2,1106.3 r270 bottom value=100
R57 "RC0603JR-070RL" 0603R#2 1870.08,86.61 r270 top value=0
R58 "RC0603JR-0747KL" 0603R#2 1850.39,86.61 r90 bottom value=47K
R59 "RC0603JR-07100RL" 0603R#2 925.2,1232.28 r270 bottom value=100
R60 "RC0603JR-07100RL" 0603R#2 334.65,204.72 r270 bottom value=100
R62 "RC0603JR-0747KL" 0603R#2 1692.91,401.57 r90 top value=47K
R63 "RC0603JR-07100RL" 0603R#2 925.2,1366.14 r270 bottom value=100
R64 "RC0603JR-0747KL" 0603R#2 1948.82,283.46 r180 top value=47K
R65 "RC0603JR-0710KL" 0603R#2 1811.02,440.94 r180 bottom value=10K
R66 "RC0603JR-07100RL" 0603R#2 925.2,1543.31 r270 bottom value=100
R67 "RC0603FR-0710RL" 0603R#2 4205.12,1102.36 r0 bottom value=10
R68 "820" 0603R#2 472.44,2458.66 r270 bottom
R69 "RC0603JR-07100RL" 0603R#2 460.63,1261.81 r180 top value=100
R70 "RC0603JR-070RL" 0603R#2 460.63,1214.57 r180 top value=0
R71 "RC0603JR-07100RL" 0603R#2 460.63,1135.83 r180 top value=100
R72 "1K" 0603R#2 3307.09,706.69 r270 bottom
R73 "RC0603FR-07100KL" 0603R#2 4205.12,1161.42 r0 bottom value=100K
R74 "RC0603JR-07330RL" 0603R#2 1726.77,86.61 r270 top value=330
R75 "RC0603JR-07620RL" 0603R#2 1948.82,204.72 r270 bottom value=620
R76 "RC0603FR-07100KL" 0603R#2 3893.7,1299.21 r180 bottom value=100K
R77 "[N/A]" 0603R#2 3893.7,1358.27 r180 bottom value=100K
R78 "RC0603FR-0710KL" 0603R#2 1033.46,874.02 r0 bottom value=10K
R79 "[N/A]" 0603R#2 1151.57,844.49 r90 bottom value=10K
R80 "RC0603JR-070RL" 0603R#2 3937.01,1759.84 r270 bottom value=0
R81 "RC0603FR-07100KL" 0603R#2 3996.06,1956.69 r90 bottom value=100K
R82 "RC0603FR-072K2L" 0603R#2 4025.59,1807.09 r0 bottom value=2K2
R83 "RC0603FR-0710KL" 0603R#2 4055.12,1494.09 r90 bottom value=10K
R84 "RC0603FR-07100KL" 0603R#2 4807.09,1862.2 r180 top value=100K
R85 "1_1%_0805" 0805R 4807.87,1793.31 r0 top value=1
R86 "RC0603FR-0750RL" 0603R#2 4330.71,2045.28 r180 bottom value=50
R87 "[N/A]" 0603R#2 3562.99,2074.8 r180 bottom value=1K5
R88 "[N/A]" 0603R#2 3562.99,2019.68 r0 bottom value=1K5
R89 "[N/A]" 0603R#2 3562.99,2129.92 r180 bottom value=100K
R90 "RC0603FR-0750RL" 0603R#2 4458.66,2045.28 r0 bottom value=50
R91 "RC0603FR-0710KL" 0603R#2 4458.66,1673.23 r180 bottom value=10K
R92 "RC0603FR-076K04L" 0603R#2 5019.68,1153.54 r180 top value=6K04
R93 "RC0603JR-070RL" 0603R#2 2448.82,1289.37 r0 bottom value=0
R94 "RC0603FR-07100KL" 0603R#2 4807.09,1720.47 r0 top value=100K
R95 "10K_1%_0805" 0805R 4807.87,1641.73 r0 top value=10K
R96 "RC0603FR-076K04L" 0603R#2 4807.09,1200.79 r180 bottom value=6K04
R97 "RC0603FR-07300KL" 0603R#2 4437.01,814.96 r0 bottom value=300K
R98 "RC0603FR-0711KL" 0603R#2 4651.57,814.96 r0 top value=11K
R99 "[N/A]" 0603R#2 3901.57,1917.32 r0 bottom value=100K
R100 "RC0603JR-0722RL" 0603R#2 2862.2,877.95 r90 bottom value=22
R101 "RC0603FR-07357KL" 0603R#2 4649.61,877.95 r180 top value=357K
R102 "RC0603JR-07100RL" 0603R#2 4122.05,838.58 r270 top value=100
R103 "RC0603FR-07300KL" 0603R#2 4185.04,838.58 r270 top value=300K
R104 "[N/A]" 0603R#2 3901.57,1854.33 r0 bottom value=100K
R105 "RC0603JR-070RL" 0603R#2 4649.61,940.94 r180 top value=0
R106 "RC0603FR-07100KL" 0603R#2 4988.19,1562.99 r180 top value=100K
R107 "24_1%_0805" 0805R 4996.85,1484.25 r0 top value=24
R109 "RC0603FR-07100KL" 0603R#2 3336.61,1129.92 r90 bottom value=100K
R110 "RC0603FR-07100KL" 0603R#2 4996.06,1397.64 r180 top value=100K
R111 "620_1%_0805" 0805R 4996.85,1318.9 r0 top value=620
R112 "RC0603FR-07510RL" 0603R#2 3356.3,1385.83 r0 bottom value=510
R113 "RC0603FR-0710KL" 0603R#2 3356.3,1336.61 r0 bottom value=10K
R114 "RC0603JR-070RL" 0603R#2 3287.4,1129.92 r90 bottom value=0
R115 "RC0603FR-07100KL" 0603R#2 3562.99,1956.69 r0 bottom value=100K
R116 "RC0603FR-07100KL" 0603R#2 4515.75,1366.14 r270 top value=100K
R117 "RC0603FR-07100KL" 0603R#2 1929.13,1464.57 r90 bottom value=100K
R118 "47K" 0603R#2 3588.58,620.08 r90 bottom
R119 "47K" 0603R#2 3647.64,620.08 r90 bottom
R120 "47K" 0603R#2 3706.69,620.08 r90 bottom
R121 "47K" 0603R#2 3864.17,620.08 r90 bottom
R122 "47K" 0603R#2 3923.23,620.08 r90 bottom
R123 "RC0603JR-07510RL" 0603R#1 2681.1,2562.99 r90 top value=510
R124 "1M" 0603R#2 2846.46,2248.03 r0 top
R129 "RC0603JR-070RL" 0603R#2 2870.08,2161.42 r0 bottom value=0
R130 "[N/A]" 0603R#2 2870.08,2100.39 r0 bottom value=0
SB1 "Solder Bridge ON" SB_0603 2744.09,2287.4 r90 top
SB2 "Solder Bridge OFF" SB_0603 2956.69,2287.4 r270 top
SB3 "Solder Bridge ON" SB_0603 2165.35,1346.46 r0 bottom
SB4 "Solder Bridge OFF" SB_0603 1547.24,547.24 r90 bottom
SB5 "Solder Bridge OFF" SB_0603 1358.27,547.24 r270 bottom
SB6 "Solder Bridge ON" SB_0603 1295.28,547.24 r90 bottom
SB7 "Solder Bridge ON" SB_0603 1484.25,547.24 r90 bottom
SB8 "Solder Bridge ON" SB_0603 1421.26,547.24 r270 bottom
SB9 "Solder Bridge OFF" SB_0603 1232.28,547.24 r90 bottom
SB11 "Solder Bridge OFF" SB_0603 1673.23,2114.17 r90 top
SB12 "Solder Bridge ON" SB_0603 2718.5,1726.38 r270 bottom
SB13 "Solder Bridge ON" SB_0603 1122.05,1194.49 r270 top
SB14 "Solder Bridge ON" SB_0603 2224.41,1523.62 r180 top
SB15 "Solder Bridge OFF" SB_0603 2224.41,1523.62 r180 bottom
SB16 "Solder Bridge ON" SB_0603 1791.34,86.61 r270 bottom
SB17 "Solder Bridge ON" SB_0603 1397.64,863.78 r90 bottom
SB18 "Solder Bridge ON" SB_0603 4114.17,1494.09 r90 bottom
SB19 "Solder Bridge ON" SB_0603 4318.9,1956.69 r270 bottom
SB20 "Solder Bridge ON" SB_0603 3901.57,2153.54 r180 bottom
SB21 "Solder Bridge ON" SB_0603 3901.57,2035.43 r0 bottom
SB22 "Solder Bridge OFF" SB_0603 3901.57,1976.38 r180 bottom
SB24 "Solder Bridge ON" SB_0603 3356.3,1484.25 r180 bottom
SB25 "Solder Bridge OFF" SB_0603 2122.05,681.1 r270 bottom
SB26 "Solder Bridge ON" SB_0603 2066.93,681.1 r270 bottom
SB27 "Solder Bridge OFF" SB_0603 1996.06,681.1 r270 bottom
SB28 "Solder Bridge ON" SB_0603 1901.57,681.1 r270 bottom
SW1 "EDG-501S" SW1_11R7X9R7-12R2X9R65-HDR_CPT 1909.45,2399.61 r0 top
T1 "BSN20BK" SOT-23 2846.46,2358.27 r0 top
T2 "9013-SOT23" SOT-23 1279.53,2232.28 r180 bottom
T3 "9013-SOT23" SOT-23 1811.02,480.32 r0 top
T4 "STT7P2UH7" SOT23-6L 4629.53,1827.17 r90 top
T5 "STT7P2UH7" SOT23-6L 4983.86,1716.93 r90 top
T6 "STT7P2UH7" SOT23-6L 4629.53,1671.26 r90 top
T7 "STT7P2UH7" SOT23-6L 4818.5,1504.33 r90 top
T8 "STT7P2UH7" SOT23-6L 4413.39,1374.02 r180 top
T9 "STT7P2UH7" SOT23-6L 4818.5,1354.72 r90 top
T10 "STT7P2UH7" SOT23-6L 4625.98,1374.02 r180 top
T11 "STT7P2UH7" SOT23-6L 3716.93,1756.3 r90 bottom
T12 "STT7P2UH7" SOT23-6L 3716.93,1901.18 r90 bottom
U1 "MP34DT01TR-M" MP34DT01TR 1294.49,859.06 r270 top
U2 "MP34DT01TR-M" MP34DT01TR 1038.58,859.06 r270 top
U3 "MX25R6435FM2IL0" SOIC8_1R27_5R28X7R9 2046.85,1216.54 r270 top
U4 "IS66WV51216EBLL-70BLI" FBGA48_0R75_6X8 2694.88,1932.28 r270 top
U5 "STM32L496AG" FBGA169_0R5_7X7 2725.98,1121.26 r0 top
U6 "STM32F103CBT6" LQFP48_0R5_9X9 1655.91,1801.97 r0 top
U7 "ST890CDR" SOIC8_1R27_4R9X6 795.28,2028.74 r90 top
U8 "SN74LVC2T45DCUT" USOP8_0R5_2X3R1 1266.14,1211.81 r270 top
U9 "LD3985M33R" SOT23-5 2205.91,2066.93 r90 bottom
U10 "LD1117S50TR" SOT-223 340.16,1435.83 r0 top
U11 "SN74LVC2T45DCUT" USOP8_0R5_2X3R1 1178.74,1355.12 r270 bottom
U12 "TPS62743" BGA8_0R4_0R9X1R6 258.27,1802.36 r180 bottom
U13 "TPS62743" BGA8_0R4_0R9X1R6 540.55,1798.43 r180 bottom
U14 "STMPS2141STR" SOT23-5 1837.8,252.76 r0 bottom
U15 "STLD40DPUR" SON8_0R65_3X3 4068.5,1181.1 r270 bottom
U16 "[N/A]" RHLGA5LD 1055.51,726.38 r90 bottom
U17 "[N/A]" RHLGA5LD 1311.81,723.62 r90 bottom
U18 "CS42L51-CNZ" QFN32_0R5_5X5 4264.17,1732.68 r0 top
U19 "TSZ122IST" MINISO8 4793.7,1193.7 r90 top
U20 "TSZ122IST" MINISO8 4450.39,820.08 r270 top
U21 "STM32L152CCT6" LQFP48_0R5_9X9 3429.13,1420.87 r90 top
U22 "USBLC6-2SC6" SOT23-6L 1420.87,2216.14 r180 top
U23 "ST1PS01EJR" BGA8_0R312-0R25_1R11X1R41 268.11,1806.69 r180 top
U24 "ST1PS01EJR" BGA8_0R312-0R25_1R11X1R41 553.54,1806.69 r180 top
X1 "NDK NX3215SA-32.768KHZ-EXS00A-MU00525" XTAL_2SM_3R2X1R5 2322.83,1128.35 r270 top
X2 "NX3225GD-8.00M" XTAL_2SM_3R2X2R5 1200.79,1818.9 r90 top
Z1 "STPS1L40M" DO-216AA 3890.16,1161.42 r90 bottom

## Footprints (in the part's own frame and the unit in brackets; to place one, negate y for a bottom-side part, rotate by r counter-clockwise, add the part's x,y. Pads: shape width x height; smd on the part's side, far side on the other; paste and mask are expansions set on the pad)
0402C [mil] "0402C"
  rect 22x22 smd: 1(-20,0) 2(20,0)
  body extent -35,-14 35,14, height 150
0603C [mil] "0603C"
  rect 35x32 smd: 1(-30,0) 2(30,0)
0603D#1 [mil] "0603D"
  rect 35x32 smd: 1(-30,0)
  body extent -50,-20 50,20, height 150
0603D#2 [mil] "0603D"
  rect 35x32 smd: 2(30,0)
  body extent -50,-20 50,20, height 150
0603D#3 [mil] "0603D"
  rect 35x32 smd: 1(-30,0) 2(30,0)
  body extent -50,-20 50,20, height 150
0603L [mil] "0603L"
  rect 35x32 smd: 1(-30,0) 2(30,0)
  body extent -50,-19 50,19, height 150
0603R#1 [mil] "0603R"
  rect 31x32 smd: 1(-30,0)
  silkscreen extent -57,-25 57,25, body extent -50,-20 50,20, height 150
0603R#2 [mil] "0603R"
  rect 31x32 smd: 1(-30,0) 2(30,0)
  silkscreen extent -57,-25 57,25, body extent -50,-20 50,20, height 150
0805R [mil] "0805R"
  rect 40x50 smd: 1(35,0) 2(-35,0)
  silkscreen extent -70,-35 71,35, body extent -65,-25 65,25, height 150
1206C [mil] "1206C"
  rect 46x60 smd: 1(-58,0) 2(58,0)
  body extent -81,-30 81,30, height 150
1210L [mil] "1210L"
  rect 46x100 smd: 1(-58,0) 2(58,0)
  body extent -83,-53 83,53, height 150
BGA8_0R4_0R9X1R6 [mil] "BGA8_0R4_0R9X1R6"
  round 10 smd: A1(7.87,-23.62) A2(-7.87,-23.62) B1(7.87,-7.87) B2(-7.87,-7.87) C1(7.87,7.87) C2(-7.87,7.87) D1(7.87,23.62) D2(-7.87,23.62)
  body extent -20,-35 20,35, height 150
BGA8_0R312-0R25_1R11X1R41 [mil] "BGA8_0R312-0R25_1R11X1R41"
  round 9 smd mask+1: A1(-12.28,19.69) A3(12.28,19.69) B2(0,9.84) C1(-12.28,0) C3(12.28,0) D2(0,-9.84) E1(-12.28,-19.69) E3(12.28,-19.69)
  body extent -22,-28 22,28, height 150
DF37NB-10DS-0R4V [mil] "DF37NB-10DS-0R4V"
  rect 8x27 smd: 1(-31.82,52.17) 2(-16.07,52.17) 3(-0.32,52.17) 4(15.43,52.17) 5(31.18,52.17) 6(31.18,-52.17) 7(15.43,-52.17) 8(-0.32,-52.17) 9(-16.07,-52.17) 10(-31.82,-52.17)
  rect 16x43 smd: 11(79.99,0) 12(-80.63,0)
  body extent -90,-70 90,70, height 150
DO-216AA [mil] "DO-216AA"
  rect 45x32 smd: 1(65,0)
  rect 90x89 smd: 2(-25,0)
  body extent -100,-55 100,55, height 150
FBGA48_0R75_6X8 [mil] "FBGA48_0R75_6X8"
  round 14 smd mask+2: A1(-73.82,103.35) A2(-44.29,103.35) A3(-14.76,103.35) A4(14.76,103.35) A5(44.29,103.35) A6(73.82,103.35) B1(-73.82,73.82) B2(-44.29,73.82) B3(-14.76,73.82) B4(14.76,73.82) B5(44.29,73.82) B6(73.82,73.82) C1(-73.82,44.29) C2(-44.29,44.29) C3(-14.76,44.29) C4(14.76,44.29) C5(44.29,44.29) C6(73.82,44.29) D1(-73.82,14.76) D2(-44.29,14.76) D3(-14.76,14.76) D4(14.76,14.76) D5(44.29,14.76) D6(73.82,14.76) E1(-73.82,-14.76) E2(-44.29,-14.76) E3(-14.76,-14.76) E4(14.76,-14.76) E5(44.29,-14.76) E6(73.82,-14.76) F1(-73.82,-44.29) F2(-44.29,-44.29) F3(-14.76,-44.29) F4(14.76,-44.29) F5(44.29,-44.29) F6(73.82,-44.29) G1(-73.82,-73.82) G2(-44.29,-73.82) G3(-14.76,-73.82) G4(14.76,-73.82) G5(44.29,-73.82) G6(73.82,-73.82) H1(-73.82,-103.35) H2(-44.29,-103.35) H3(-14.76,-103.35) H4(14.76,-103.35) H5(44.29,-103.35) H6(73.82,-103.35)
  body extent -120,-160 120,160, height 150
FBGA169_0R5_7X7 [mil] "FBGA169_0R5_7X7"
  round 11 smd mask+2: A1(-118.11,118.11) A2(-98.43,118.11) A3(-78.74,118.11) A4(-59.06,118.11) A5(-39.37,118.11) A6(-19.69,118.11) A7(0,118.11) A8(19.69,118.11) A9(39.37,118.11) A10(59.06,118.11) A11(78.74,118.11) A12(98.43,118.11) A13(118.11,118.11) B1(-118.11,98.43) B2(-98.43,98.43) B3(-78.74,98.43) B4(-59.06,98.43) B5(-39.37,98.43) B6(-19.69,98.43) B7(0,98.43) B8(19.69,98.43) B9(39.37,98.43) B10(59.06,98.43) B11(78.74,98.43) B12(98.43,98.43) B13(118.11,98.43) C1(-118.11,78.74) C2(-98.43,78.74) C3(-78.74,78.74) C4(-59.06,78.74) C5(-39.37,78.74) C6(-19.69,78.74) C7(0,78.74) C8(19.69,78.74) C9(39.37,78.74) C10(59.06,78.74) C11(78.74,78.74) C12(98.43,78.74) C13(118.11,78.74) D1(-118.11,59.06) D2(-98.43,59.06) D3(-78.74,59.06) D4(-59.06,59.06) D5(-39.37,59.06) D6(-19.69,59.06) D7(0,59.06) D8(19.69,59.06) D9(39.37,59.06) D10(59.06,59.06) D11(78.74,59.06) D12(98.43,59.06) D13(118.11,59.06) E1(-118.11,39.37) E2(-98.43,39.37) E3(-78.74,39.37) E4(-59.06,39.37) E5(-39.37,39.37) E6(-19.69,39.37) E7(0,39.37) E8(19.69,39.37) E9(39.37,39.37) E10(59.06,39.37) E11(78.74,39.37) E12(98.43,39.37) E13(118.11,39.37) F1(-118.11,19.69) F2(-98.43,19.69) F3(-78.74,19.69) F4(-59.06,19.69) F5(-39.37,19.69) F6(-19.69,19.69) F7(0,19.69) F8(19.69,19.69) F9(39.37,19.69) F10(59.06,19.69) F11(78.74,19.69) F12(98.43,19.69) F13(118.11,19.69) G1(-118.11,0) G2(-98.43,0) G3(-78.74,0) G4(-59.06,0) G5(-39.37,0) G6(-19.69,0) G7(0,0) G8(19.69,0) G9(39.37,0) G10(59.06,0) G11(78.74,0) G12(98.43,0) G13(118.11,0) H1(-118.11,-19.69) H2(-98.43,-19.69) H3(-78.74,-19.69) H4(-59.06,-19.69) H5(-39.37,-19.69) H6(-19.69,-19.69) H7(0,-19.69) H8(19.69,-19.69) H9(39.37,-19.69) H10(59.06,-19.69) H11(78.74,-19.69) H12(98.43,-19.69) H13(118.11,-19.69) J1(-118.11,-39.37) J2(-98.43,-39.37) J3(-78.74,-39.37) J4(-59.06,-39.37) J5(-39.37,-39.37) J6(-19.69,-39.37) J7(0,-39.37) J8(19.69,-39.37) J9(39.37,-39.37) J10(59.06,-39.37) J11(78.74,-39.37) J12(98.43,-39.37) J13(118.11,-39.37) K1(-118.11,-59.06) K2(-98.43,-59.06) K3(-78.74,-59.06) K4(-59.06,-59.06) K5(-39.37,-59.06) K6(-19.69,-59.06) K7(0,-59.06) K8(19.69,-59.06) K9(39.37,-59.06) K10(59.06,-59.06) K11(78.74,-59.06) K12(98.43,-59.06) K13(118.11,-59.06) L1(-118.11,-78.74) L2(-98.43,-78.74) L3(-78.74,-78.74) L4(-59.06,-78.74) L5(-39.37,-78.74) L6(-19.69,-78.74) L7(0,-78.74) L8(19.69,-78.74) L9(39.37,-78.74) L10(59.06,-78.74) L11(78.74,-78.74) L12(98.43,-78.74) L13(118.11,-78.74) M1(-118.11,-98.43) M2(-98.43,-98.43) M3(-78.74,-98.43) M4(-59.06,-98.43) M5(-39.37,-98.43) M6(-19.69,-98.43) M7(0,-98.43) M8(19.69,-98.43) M9(39.37,-98.43) M10(59.06,-98.43) M11(78.74,-98.43) M12(98.43,-98.43) M13(118.11,-98.43) N1(-118.11,-118.11) N2(-98.43,-118.11) N3(-78.74,-118.11) N4(-59.06,-118.11) N5(-39.37,-118.11) N6(-19.69,-118.11) N7(0,-118.11) N8(19.69,-118.11) N9(39.37,-118.11) N10(59.06,-118.11) N11(78.74,-118.11) N12(98.43,-118.11) N13(118.11,-118.11)
  body extent -138,-138 138,138, height 150
FH26-29S-0R3SHW [mil] "FH26-29S-0R3SHW"
  rect 12x32 smd: 1(-164.05,-59.59) 3(-140.43,-59.59) 5(-116.81,-59.59) 7(-93.19,-59.59) 9(-69.57,-59.59) 11(-45.94,-59.59) 13(-22.32,-59.59) 15(1.3,-59.59) 17(24.92,-59.59) 19(48.54,-59.59) 21(72.17,-59.59) 23(95.79,-59.59) 25(119.41,-59.59) 27(143.03,-59.59) 29(166.65,-59.59)
  rect 11x32 smd mask+2: 2(-152.24,54.59) 4(-128.62,54.59) 6(-105,54.59) 8(-81.38,54.59) 10(-57.76,54.59) 12(-34.13,54.59) 14(-10.51,54.59) 16(13.11,54.59) 18(36.73,54.59) 20(60.36,54.59) 22(83.98,54.59) 24(107.6,54.59) 26(131.22,54.59) 28(154.84,54.59)
  rect 16x37 smd: " "(-191.61,-49.74) " "(194.21,-49.74)
  body extent -204,-75 204,75, height 150
FPU330ZH-BT1D3-CA [mil] "FPU330ZH-BT1D3-CA"
  rect 11x49 smd mask+2: 1(-285,92.5) 2(-265.31,92.5) 3(-245.63,92.5) 4(-225.94,92.5) 5(-206.26,92.5) 6(-186.57,92.5) 7(-166.89,92.5) 8(-147.2,92.5) 9(-127.52,92.5) 10(-107.83,92.5) 11(-88.15,92.5) 12(-68.46,92.5) 13(-48.78,92.5) 14(-29.09,92.5) 15(-9.41,92.5) 16(10.28,92.5) 17(29.96,92.5) 18(49.65,92.5) 19(69.33,92.5) 20(89.02,92.5) 21(108.7,92.5) 22(128.39,92.5) 23(148.07,92.5) 24(167.76,92.5) 25(187.44,92.5) 26(207.13,92.5) 27(226.81,92.5) 28(246.5,92.5) 29(266.18,92.5) 30(285.87,92.5)
  rect 79x98 smd: 31(-351.54,-8.88) 32(352.4,-8.88)
  body extent -395,-122 395,123, height 150
HDR_1X4_2R54 [mil] "HDR_1X4_2R54"
  rect 52x52 hole 36: 1(150,0)
  round 52 hole 36: 2(50,0) 3(-50,0) 4(-150,0)
  body extent -200,-50 200,50, height 150
HDR_1X6_2R54_W [mil] "HDR_1X6_2R54_W"
  rect 60x60 / inner round 60 / far side rect 60x60 hole 40: 1(-250,0)
  round 60 hole 40: 2(-150,0) 3(-50,0) 4(50,0) 5(150,0) 6(250,0)
  body extent -300,-50 300,50, height 150
HDR_2X5_2R54 [mil] "HDR_2X5_2R54"
  rect 52x52 hole 36: 1(-200.39,-50)
  round 52 hole 36: 2(-200.39,50) 3(-100.39,-50) 4(-100.39,50) 5(-0.39,-50) 6(-0.39,50) 7(99.61,-50) 8(99.61,50) 9(199.61,-50) 10(199.61,50)
  body extent -245,-100 245,100, height 150
HOLE_C7D3R5 [mil] "HOLE_C7D3R5"
  round 276 hole 138: 1(0,0)
  body extent -144,-144 144,144, height 150
L1008_L0805_CPT [mil] "L1008_L0805_CPT"
  rect 53x100 smd: 1(-39,0) 2(39,0)
  body extent -70,-55 70,55, height 150
LED2_3528 [mil] "LED2_3528"
  rect 44x59 smd: 1(-29.53,-59.06) 2(-29.53,59.06) 3(29.53,59.06) 4(29.53,-59.06)
  body extent -55,-90 55,90, height 150
LQFP48_0R5_9X9 [mil] "LQFP48_0R5_9X9"
  rect 53x11 smd mask+2: 1(-171.26,108.27) 2(-171.26,88.58) 3(-171.26,68.9) 4(-171.26,49.21) 5(-171.26,29.53) 6(-171.26,9.84) 7(-171.26,-9.84) 8(-171.26,-29.53) 9(-171.26,-49.21) 10(-171.26,-68.9) 11(-171.26,-88.58) 12(-171.26,-108.27) 25(171.26,-108.27) 26(171.26,-88.58) 27(171.26,-68.9) 28(171.26,-49.21) 29(171.26,-29.53) 30(171.26,-9.84) 31(171.26,9.84) 32(171.26,29.53) 33(171.26,49.21) 34(171.26,68.9) 35(171.26,88.58) 36(171.26,108.27)
  rect 11x53 smd mask+2: 13(-108.27,-171.26) 14(-88.58,-171.26) 15(-68.9,-171.26) 16(-49.21,-171.26) 17(-29.53,-171.26) 18(-9.84,-171.26) 19(9.84,-171.26) 20(29.53,-171.26) 21(49.21,-171.26) 22(68.9,-171.26) 23(88.58,-171.26) 24(108.27,-171.26) 37(108.27,171.26) 38(88.58,171.26) 39(68.9,171.26) 40(49.21,171.26) 41(29.53,171.26) 42(9.84,171.26) 43(-9.84,171.26) 44(-29.53,171.26) 45(-49.21,171.26) 46(-68.9,171.26) 47(-88.58,171.26) 48(-108.27,171.26)
MICRO_USB_B_105017 [mil] "MICRO_USB_B_105017"
  rect 16x53 smd: 1(-51.18,85.45) 2(-25.59,85.45) 3(0,85.45) 4(25.59,85.45) 5(51.18,85.45)
  oval 47x75 hole 24 slot 51 at 90 deg: 6(-137.8,-19.86) 7(137.8,-19.86)
  round 59 hole 33: 8(-98.43,86.44) 9(98.43,86.44)
  rect 59x75 smd: 10(-39.37,-19.86) 11(39.37,-19.86)
  body extent -165,-118 165,118, height 150
MINISO8 [mil] "MINISO8"
  rect 14x47 smd: 1(38.39,87.99) 2(12.8,87.99) 3(-12.8,87.99) 4(-38.39,87.99) 5(-38.39,-87.99) 6(-12.8,-87.99) 7(12.8,-87.99) 8(38.39,-87.99)
  silkscreen extent 54,-15 65,15, body extent -59,-115 59,115, height 150
MOLEX_47590001 [mil] "MOLEX_47590001"
  rect 16x53 smd: 1(51.18,85.06) 2(25.59,85.06) 3(0,85.06) 4(-25.59,85.06) 5(-51.18,85.06)
  oval 42x63 hole 30 slot 33 at 90 deg: 6(89.57,97.86) 7(-89.57,97.86)
  oval 55x75 hole 33 slot 59 at 90 deg: 8(-163.39,-27.34) 9(163.39,-27.34)
  rect 114x79 smd: 10(0,-20.25)
  silkscreen extent -118,-131 118,-119, body extent -190,-130 190,130, height 150
MP34DT01TR [mil] "MP34DT01TR"
  rect 20x42 smd: 1(-16.97,26.73) 2(-16.97,-26.41) 3(16.49,-26.41) 4(16.49,26.73)
  round 6 smd: 5(-1.24,-68.84)
  body extent -59,-79 59,79, height 150
MSD_PJS008_ [mil] "MSD_PJS008_"
  rect 32x63 smd: 1(99.43,-278.35) 2(56.12,-278.35) 3(12.81,-278.35) 4(-30.49,-278.35) 5(-73.8,-278.35) 6(-117.11,-278.35) 7(-160.41,-278.35) 8(-203.72,-278.35)
  rect 33x63 smd: 9(-249,-278.35)
  rect 77x75 smd: 10(-284.43,123.23)
  rect 60x121 smd: 11(-293.29,239.37)
  rect 55x135 smd: 12(295.41,239.65)
  rect 63x138 smd: 13(291.36,-193.7)
  rect 47x122 smd: 14(-299.19,-213.39)
  round 28 hole 28 unplated: " "(-139.74,-50) " "(157.5,-50)
  body extent -328,-315 328,315, height 150
MT-008A [mil] "MT-008A"
  rect 39.99x70 smd: 1(-58.87,-123.3) 2(-3.75,-123.29) 3(51.37,-123.3) 4(51.37,120.81) 5(-3.75,120.8) 6(-58.87,120.81) 7(-145.48,-1.24) 8(141.92,-1.24)
  round 28 hole 28 unplated: " "(-78.55,-1.24)
  round 39 hole 39 unplated: " "(71.05,-1.24)
  body extent -169,-161 166,159, height 150
PB10 [mil] "PB10"
  rect 60x40 smd paste+12: 1(-177.16,-87.5) 2(-177.16,87.5) 3(177.18,87.5) 4(177.18,-87.5)
  body extent -207,-108 207,108, height 150
PJ3028B [mil] "PJ3028B"
  rect 79x98 smd: 3(187.62,157.48) 4(116.75,-157.48) 6(-174.58,157.48)
  rect 98x79 smd: 5(-334.03,-31.5)
  rect 48x98 smd: 7(226.99,-157.48)
  round 79 hole 79 unplated: " "(-127.34,0) " "(148.25,0)
  body extent -383,-210 383,210, height 150
QFN32_0R5_5X5 [mil] "QFN32_0R5_5X5"
  oval 34x11 smd mask+2: 1(95.28,-68.9) 2(95.28,-49.21) 3(95.28,-29.53) 4(95.28,-9.84) 5(95.28,9.84) 6(95.28,29.53) 7(95.28,49.21) 8(95.28,68.9) 17(-95.28,68.9) 18(-95.28,49.21) 19(-95.28,29.53) 20(-95.28,9.84) 21(-95.28,-9.84) 22(-95.28,-29.53) 23(-95.28,-49.21) 24(-95.28,-68.9)
  oval 11x34 smd mask+2: 9(68.9,95.28) 10(49.21,95.28) 11(29.53,95.28) 12(9.84,95.28) 13(-9.84,95.28) 14(-29.53,95.28) 15(-49.21,95.28) 16(-68.9,95.28) 25(-68.9,-95.28) 26(-49.21,-95.28) 27(-29.53,-95.28) 28(-9.84,-95.28) 29(9.84,-95.28) 30(29.53,-95.28) 31(49.21,-95.28) 32(68.9,-95.28)
  rect 135x135 smd: 33(0,0)
  body extent -115,-115 115,115, height 150
RHLGA5LD [mil] "RHLGA5LD"
  rect 23x30 smd: 1(53.7,35.47) 2(21.34,35.47) 4(21.34,-30.47) 5(53.7,-30.47)
  round 6 smd: 3(-28,-23.5)
  round 20 hole 20: " "(-27.95,2.5)
  body extent -70,-53 70,53, height 150
SB_0603 [mil] "SB_0603"
  round 6 smd: 1(-30,0) 2(30,0)
  body extent -50,-20 50,20, height 150
SIP2 [mil] "SIP2"
  rect 60x60 / inner round 60 / far side rect 60x60 hole 40: 1(-50,0)
  round 60 hole 40: 2(50,0)
SIP3 [mil] "SIP3"
  rect 60x60 / inner round 60 / far side rect 60x60 hole 40: 1(-100,0)
  round 60 hole 40: 2(0,0) 3(100,0)
SOD-323 [mil] "SOD-323"
  rect 32x32 smd: 1(44.29,1) 2(-44.29,1)
  body extent -65,-26 65,26, height 150
SOIC8_1R27_4R9X6 [mil] "SOIC8_1R27_4R9X6"
  rect 22x70 smd: 1(-75,-103.3) 2(-25,-103.3) 3(25,-103.3) 4(75,-103.3) 5(75,103.3) 6(25,103.3) 7(-25,103.3) 8(-75,103.3)
  silkscreen extent -100,-20 -79,20, body extent -96,-141 96,141, height 150
SOIC8_1R27_5R28X7R9 [mil] "SOIC8_1R27_5R28X7R9"
  rect 24x64 smd: 1(-74.5,-143.22) 2(-24.5,-143.22) 3(25.5,-143.22) 4(75.5,-143.22) 5(75.5,142.22) 6(25.5,142.22) 7(-24.5,142.22) 8(-74.5,142.22)
  silkscreen extent -104,-20 -85,19, body extent -105,-178 105,177, height 150
SON8_0R65_3X3 [mil] "SON8_0R65_3X3"
  rect 16x31 smd: 1(-38.39,-58.07) 2(-12.8,-58.07) 3(12.8,-58.07) 4(38.39,-58.07) 5(38.39,58.07) 6(12.8,58.07) 7(-12.8,58.07) 8(-38.39,58.07)
  oct 1x1 smd: 9(0,0)
  body extent -78,-78 78,78, height 150
SOT23-5 [mil] "SOT23-5"
  rect 25x45 smd: 1(-37.4,-47.24) 2(0,-47.24) 3(37.4,-47.24) 4(37.4,47.24) 5(-37.4,47.24)
  body extent -57,-70 57,70, height 150
SOT23-6L [mil] "SOT23-6L"
  rect 25x53 smd: 1(-37.4,-47.24) 2(0,-47.24) 3(37.4,-47.24) 4(37.4,47.24) 5(0,47.24) 6(-37.4,47.24)
  body extent -57,-75 57,75, height 150
SOT-23 [mil] "SOT-23"
  rect 25x45 smd: 1(-37.4,-43.31) 2(37.4,-43.31) 3(0,43.31)
  body extent -60,-70 60,70, height 150
SOT-223 [mil] "SOT-223"
  rect 71x40 smd: 1(124.02,-90.55) 2(124.02,0) 3(124.02,90.55)
  rect 71x130 smd: 4(-124.02,0)
  body extent -160,-128 160,128, height 150
SQT-110-01-F-D-RA [mil] "SQT-110-01-F-D-RA"
  rect 52x52 hole 36: 1(359.27,175)
  round 52 hole 36: 2(280.53,175) 3(201.79,175) 4(123.05,175) 5(44.31,175) 6(-34.43,175) 7(-113.17,175) 8(-191.91,175) 9(-270.65,175) 10(-349.39,175) 11(359.27,96.26) 12(280.53,96.26) 13(201.79,96.26) 14(123.05,96.26) 15(44.31,96.26) 16(-34.43,96.26) 17(-113.17,96.26) 18(-191.91,96.26) 19(-270.65,96.26) 20(-349.39,96.26)
  body extent -402,-205 402,205, height 150
SSW-106-02-F-D-RA [mil] "SSW-106-02-F-D-RA"
  rect 60x60 / inner round 60 / far side rect 60x60 hole 40: 1(250,229.5)
  round 60 hole 40: 2(150,229.5) 3(50,229.5) 4(-50,229.5) 5(-150,229.5) 6(-250,229.5) 7(250,129.5) 8(150,129.5) 9(50,129.5) 10(-50,129.5) 11(-150,129.5) 12(-250,129.5)
  body extent -310,-264 310,264, height 150
SSW-106-22-X-S-VS [mil] "SSW-106-22-X-S-VS"
  rect 40x95 smd: 1(250,67.5) 2(150,-67.5) 3(50,67.5) 4(-50,-67.5) 5(-150,67.5) 6(-250,-67.5)
  body extent -310,-120 310,120, height 150
SSW-108-22-X-S-VS [mil] "SSW-108-22-X-S-VS"
  rect 40x95 smd: 1(350,67.5) 2(250,-67.5) 3(150,67.5) 4(50,-67.5) 5(-50,67.5) 6(-150,-67.5) 7(-250,67.5) 8(-350,-67.5)
  body extent -410,-120 410,120, height 150
SSW-110-22-X-S-VS [mil] "SSW-110-22-X-S-VS"
  rect 40x95 smd: 1(450,67.5) 2(350,-67.5) 3(250,67.5) 4(150,-67.5) 5(50,67.5) 6(-50,-67.5) 7(-150,67.5) 8(-250,-67.5) 9(-350,67.5) 10(-450,-67.5)
  body extent -510,-120 510,120, height 150
SW1_11R7X9R7-12R2X9R65-HDR_CPT [mil] "SW1_11R7X9R7-12R2X9R65-HDR_CPT"
  rect 52x52 hole 36: 1(-150,-150)
  round 52 hole 36: 2(-50,-150) 3(50,-150) 4(150,-150) 5(150,150) 6(50,150) 7(-50,150) 8(-150,150) " "(-150,-50) " "(-50,-50) " "(50,-50) " "(150,-50)
  body extent -240,-191 240,191, height 150
TAN-A [mil] "TAN-A"
  rect 50x60 smd: 1(55,0) 2(-55,0)
TAN-B [mil] "TAN-B"
  rect 59x110 smd: 1(-67.5,0) 2(67.5,0)
  body extent -100,-55 100,55, height 150
TC2050-IDC-NL [mil] "TC2050-IDC-NL"
  round 31 smd paste-50: 1(-100.2,-25) 2(-50.2,-25) 3(-0.2,-25) 4(49.8,-25) 5(99.8,-25) 6(99.8,25) 7(49.8,25) 8(-0.2,25) 9(-50.2,25) 10(-100.2,25)
  round 39 hole 39 unplated: " "(-150.2,0) " "(149.8,-39.96) " "(149.8,39.96)
  silkscreen extent -245,-133 245,133, body extent -245,-133 245,133, height 150
USOP8_0R5_2X3R1 [mil] "USOP8_0R5_2X3R1"
  rect 11x28 smd mask+2: 1(-29.53,-59.06) 2(-9.84,-59.06) 3(9.84,-59.06) 4(29.53,-59.06) 5(29.53,59.06) 6(9.84,59.06) 7(-9.84,59.06) 8(-29.53,59.06)
  body extent -40,-75 40,75, height 150
XTAL_2SM_3R2X1R5 [mil] "XTAL_2SM_3R2X1R5"
  rect 51x63 smd: 1(-45.78,-1) 2(44.78,-1)
  body extent -72,-31 72,31, height 150